# EAGLE board 8relais (EAGLE 4.16)
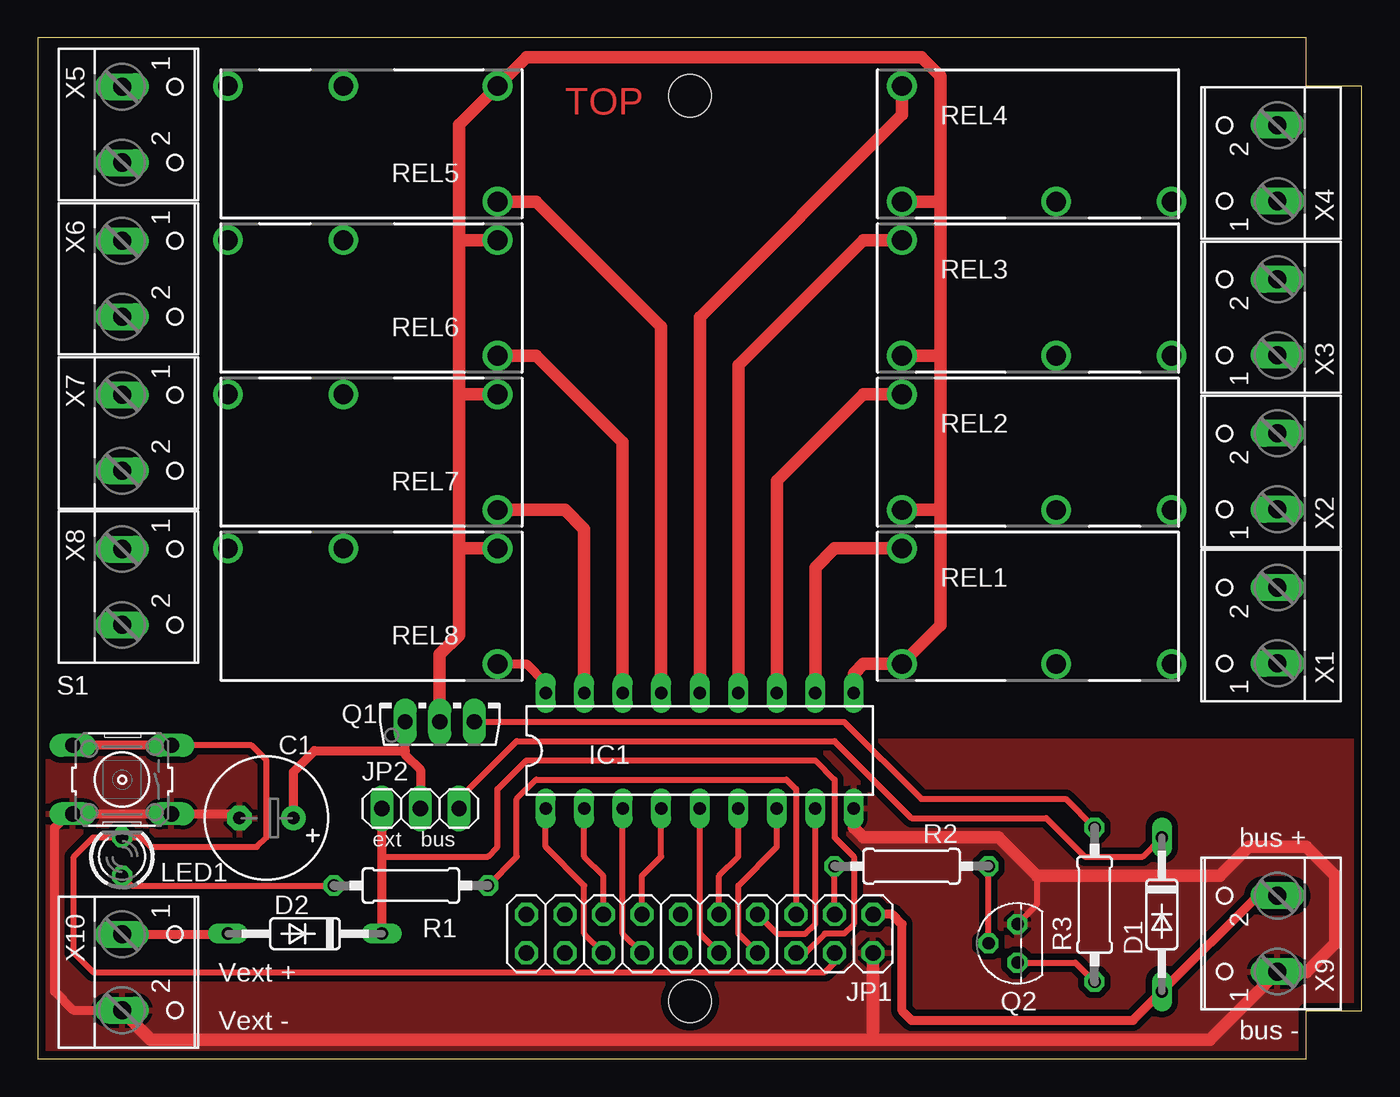
[diagram p0: board, top side]
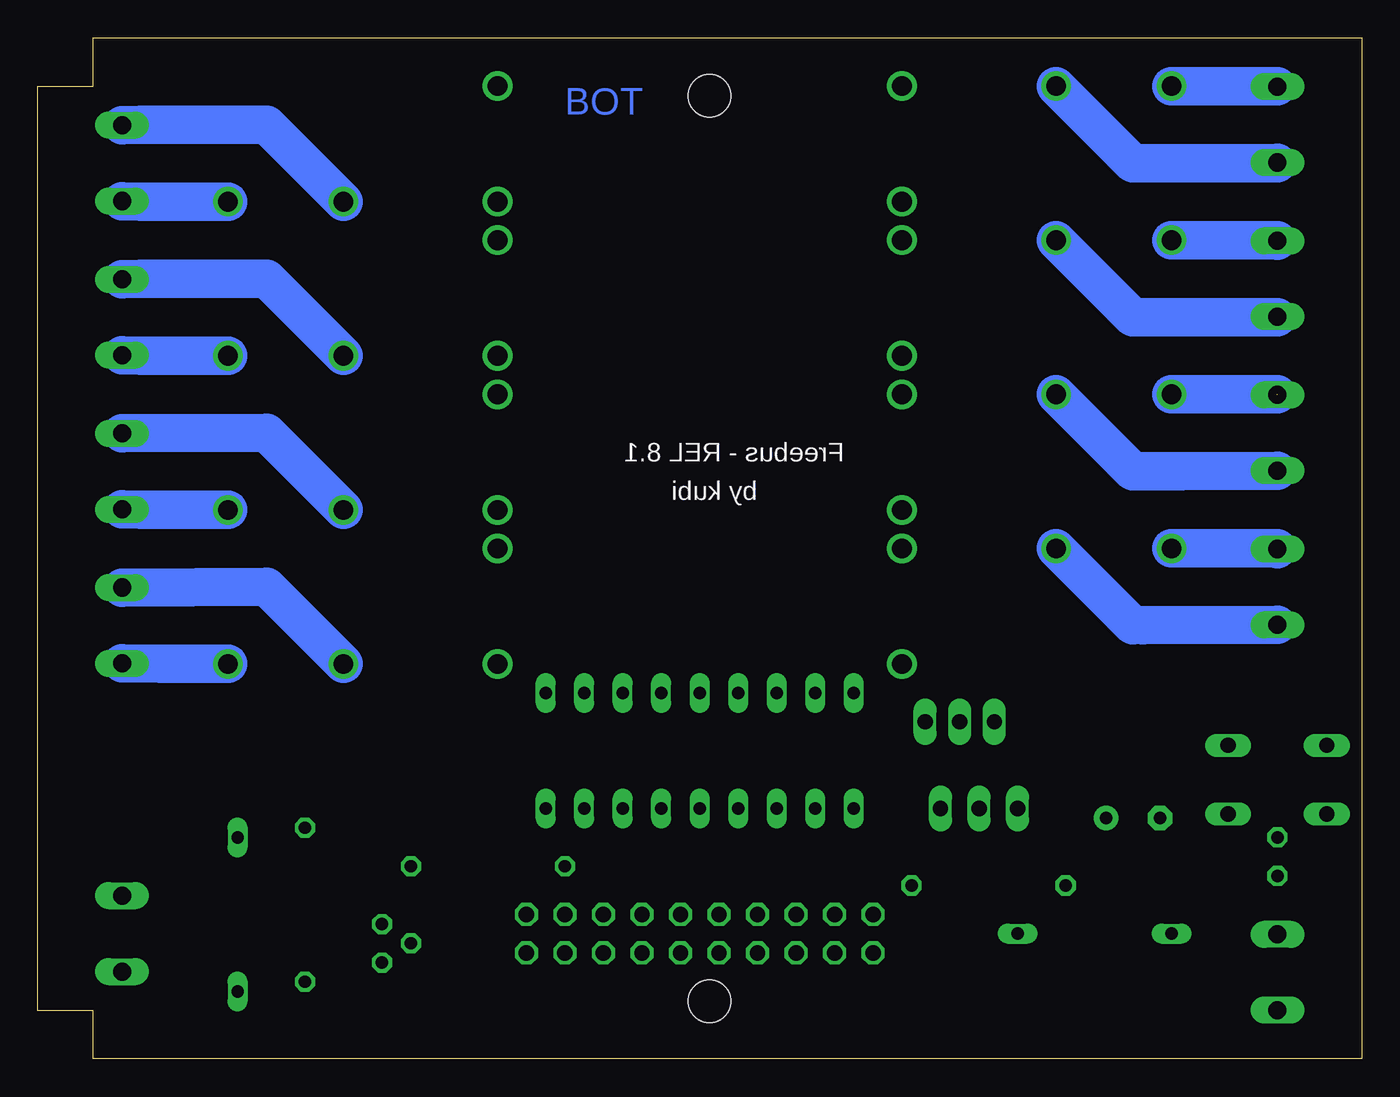
[diagram p1: board, bottom side, seen from below]

Size 87.3 x 67.31 mm. Coordinates in mm from the lower left corner, seen from the top.
Outline: 0,0.01 83.66,0 83.66,3.18 87.3,3.18 87.3,64.13 83.66,64.13 83.66,67.31 0,67.31 0,0.01
Copper layers (1*16): Top 0.035mm / dielectric 1.5mm / Bottom 0.035mm
Design rules "default": minimum track width 10mil, minimum drill 24mil, track to track 16mil, track to pad 12mil, pad to pad 16mil, via to via 16mil, smd to smd 8mil, copper to edge 20mil, drill to drill 10mil, minimum pad ring 10mil, minimum via ring 8mil, stop-mask expansion 4mil, vias tented up to drill 0mil, thermal gap 10mil
Holes 2.8 mm at 43.02,3.81 43.02,63.5

## Footprints (pad centres in the part's own frame; a part is rotated, then mirrored left to right if it is on the bottom)
E3,5-8 = drill 0.813 pad 1.6 round: + -1.778,0 | drill 0.813 pad 1.6 octagon: - 1.778,0
DO35-10 = drill 0.813 long: A 5.08,0; C -5.08,0
DIL18 = drill 0.813 long: 1 -10.16,-3.81; 2 -7.62,-3.81; 3 -5.08,-3.81; 4 -2.54,-3.81; 5 0,-3.81; 6 2.54,-3.81; 7 5.08,-3.81; 8 7.62,-3.81; 9 10.16,-3.81; 10 10.16,3.81; 11 7.62,3.81; 12 5.08,3.81; 13 2.54,3.81; 14 0,3.81; 15 -2.54,3.81; 16 -5.08,3.81; 17 -7.62,3.81; 18 -10.16,3.81
2X10 = drill 1.016 octagon: 1 -11.43,-1.27; 2 -11.43,1.27; 3 -8.89,-1.27; 4 -8.89,1.27; 5 -6.35,-1.27; 6 -6.35,1.27; 7 -3.81,-1.27; 8 -3.81,1.27; 9 -1.27,-1.27; 10 -1.27,1.27; 11 1.27,-1.27; 12 1.27,1.27; 13 3.81,-1.27; 14 3.81,1.27; 15 6.35,-1.27; 16 6.35,1.27; 17 8.89,-1.27; 18 8.89,1.27; 19 11.43,-1.27; 20 11.43,1.27
1X03 = drill 1.016 long: 1 -2.54,0; 2 0,0; 3 2.54,0
LED3MM = drill 0.813 octagon: A -1.27,0; K 1.27,0
TO126AV = drill 1.016 long: B 2.286,-1.27; C 0,-1.27; E -2.286,-1.27
TO92 = drill 0.813 octagon: 1 1.27,0; 2 0,1.905; 3 -1.27,0
0207/10 = drill 0.813 octagon: 1 -5.08,0; 2 5.08,0
RE-SCHRACK = drill 1.3 round: 11 8.89,-3.81; 14 1.27,-3.81; A1 -8.89,-3.81; A2 -8.89,3.81
B3F-10XX = drill 1.016 long: 1 -3.251,2.261; 2 3.251,2.261; 3 -3.251,-2.261; 4 3.251,-2.261
W237-102 = drill 1.194 long: 1 -2.5,-1.27; 2 2.5,-1.27

## Placement (x,y rotation side)
C1  10µ  [E3,5-8]  15.08,15.88 180 top
D1  1N4148  [DO35-10]  74.13,9.53 270 top
D2  1N4148  [DO35-10]  17.61,8.26 180 top
IC1  ULN2803  [DIL18]  43.65,20.32 0 top
JP1  [2X10]  43.65,8.26 180 top
JP2  [1X03]  25.23,16.51 0 top
LED1  rot  [LED3MM]  5.55,13.33 90 top
Q1  BD138  [TO126AV]  26.5,23.5 0 top
Q2  BC547  [TO92]  64.61,7.62 90 top
R1  1k  [0207/10]  24.6,11.43 180 top
R2  10k  [0207/10]  57.62,12.7 0 top
R3  10k  [0207/10]  69.69,10.16 90 top
REL1  G5Q-1A  [RE-SCHRACK]  65.88,29.85 0 top
REL2  G5Q-1A  [RE-SCHRACK]  65.88,40 0 top
REL3  G5Q-1A  [RE-SCHRACK]  65.88,50.16 0 top
REL4  G5Q-1A  [RE-SCHRACK]  65.88,60.32 0 top
REL5  G5Q-1A  [RE-SCHRACK]  21.42,60.32 180 top
REL6  G5Q-1A  [RE-SCHRACK]  21.42,50.16 180 top
REL7  G5Q-1A  [RE-SCHRACK]  21.42,40 180 top
REL8  G5Q-1A  [RE-SCHRACK]  21.42,29.85 180 top
S1  Programmiertaster  [B3F-10XX]  5.55,18.42 180 top
X1  [W237-102]  80.48,28.58 90 top
X2  [W237-102]  80.48,38.73 90 top
X3  [W237-102]  80.48,48.89 90 top
X4  [W237-102]  80.48,59.05 90 top
X5  [W237-102]  6.82,61.59 270 top
X6  [W237-102]  6.82,51.43 270 top
X7  [W237-102]  6.82,41.27 270 top
X8  [W237-102]  6.82,31.12 270 top
X9  [W237-102]  80.48,8.26 90 top
X10  [W237-102]  6.82,5.71 270 top

## Library data of the parts
C1 R1-R3 = rcl
D1 D2 = diode
IC1 = uln-udn
JP1 JP2 = pinhead
LED1 = led
Q1 = transistor-power
Q2 = transistor-npn
REL1-REL8 = relay
S1 = switch-omron
X1-X10 = con-wago-500

## Nets
GND: C1.- IC1.9 JP1.2 Q2.1 S1.1 S1.2 X9.1 X10.2
IO1: IC1.1 JP1.16
IO2: IC1.2 JP1.15
IO3: IC1.3 JP1.14
IO4: IC1.4 JP1.13
IO5: IC1.5 JP1.10
IO6: IC1.6 JP1.9
IO7: IC1.7 JP1.8
IO8: IC1.8 JP1.7
N$1: REL4.11 X4.1
N$2: REL4.14 X4.2
N$3: REL3.11 X3.1
N$4: REL3.14 X3.2
N$5: REL2.11 X2.1
N$6: REL2.14 X2.2
N$7: REL1.11 X1.1
N$8: REL1.14 X1.2
N$9: REL5.11 X5.1
N$10: REL6.11 X6.1
N$11: REL7.11 X7.1
N$12: REL8.11 X8.1
N$13: REL5.14 X5.2
N$14: REL6.14 X6.2
N$15: REL7.14 X7.2
N$16: REL8.14 X8.2
N$17: D2.A X10.1
N$19: IC1.10 Q1.C REL1.A1 REL2.A1 REL3.A1 REL4.A1 REL5.A1 REL6.A1 REL7.A1 REL8.A1
N$20: D1.A JP1.1 X9.2
N$24: JP1.5 R1.1
N$27: JP1.4 LED1.K S1.3 S1.4
N$28: LED1.A R1.2
N$31: D2.C JP1.6 JP2.1
N$32: D1.C JP2.3
N$33: JP1.3 R2.1
N$37: Q1.B R3.2
N$38: Q2.3 R3.1
N$39: Q2.2 R2.2
R1: IC1.14 REL4.A2
R2: IC1.13 REL3.A2
R3: IC1.12 REL2.A2
R4: IC1.11 REL1.A2
R5: IC1.15 REL5.A2
R6: IC1.16 REL6.A2
R7: IC1.17 REL7.A2
R8: IC1.18 REL8.A2
VDD: C1.+ JP2.2 Q1.E

## Tracks (layer width: path | path; a pad name or v marks a point on that pad's centre or on a via)
GND
  Top 0.406: 3.29,16.15 3.01,15.88 2.73,16.15 S1.2 | Q2.1 65.88,10.16 65.88,12.06
  Top 0.61: S1.2 2.02,16.15 1.1,15.24 1.1,4.45 2.33,3.21 X10.2 | 3.29,16.15 S1.1 12.89,16.15 13.17,15.88 C1.- | 81.75,5.71 X9.1
  Top 0.813: 55.08,1.27 7.46,1.27 5.55,3.17 X10.2 | 55.08,1.27 77.3,1.27 81.75,5.71 83.66,5.71 85.56,7.62 85.56,12.06 83.66,13.97 79.84,13.97 77.94,12.06 65.88,12.06 63.34,14.61 54.45,14.61 53.81,15.24 IC1.9 | 55.08,1.27 JP1.2
  pour Top: 0.47,0.64 0.47,20.96 86.83,20.96 86.83,0.64
IO1
  Top 0.406: IC1.1 33.49,13.97 36.03,11.43 36.03,8.26 JP1.16
IO2
  Top 0.406: JP1.15 37.3,12.06 36.03,13.33 IC1.2
IO3
  Top 0.406: IC1.3 38.57,8.26 JP1.14
IO4
  Top 0.406: JP1.13 39.84,12.06 41.11,13.33 IC1.4
IO5
  Top 0.406: IC1.5 43.65,8.26 JP1.10
IO6
  Top 0.406: JP1.9 44.92,12.06 46.19,13.33 IC1.6
IO7
  Top 0.406: IC1.7 48.73,13.97 46.19,11.43 46.19,8.26 JP1.8
IO8
  Top 0.406: JP1.7 48.73,8.26 50.63,8.26 51.27,8.89 IC1.8
N$1
  Bottom 2.54: X4.1 80.48,56.52 REL4.11
N$2
  Bottom 2.54: REL4.14 72.22,61.59 80.48,61.59 X4.2
N$3
  Bottom 2.54: X3.1 80.48,46.35 REL3.11
N$4
  Bottom 2.54: REL3.14 72.22,51.43 80.48,51.43 X3.2
N$5
  Bottom 2.54: X2.1 80.48,36.2 REL2.11
N$6
  Bottom 2.54: X2.2 72.22,41.27 REL2.14
N$7
  Bottom 2.54: X1.1 79.21,26.04 REL1.11
N$8
  Bottom 2.54: X1.2 72.22,31.12 REL1.14
N$9
  Bottom 1.778: X5.1 5.55,64.14
  Bottom 2.54: 5.55,64.14 REL5.11
N$10
  Bottom 2.54: X6.1 5.55,53.98 REL6.11
N$11  (1 unrouted)
  Bottom 2.54: 5.55,43.81 REL7.11
N$12
  Bottom 2.54: REL8.11 5.55,33.66 X8.1
N$13
  Bottom 2.54: REL5.14 15.08,59.05 5.55,59.05 X5.2
N$14
  Bottom 1.778: X6.2 5.55,48.89
  Bottom 2.54: REL6.14 15.08,48.89 5.55,48.89
N$15
  Bottom 2.54: REL7.14 15.08,38.73 11.9,38.73 X7.2
N$16
  Bottom 1.778: 14.44,28.58 15.08,28.58
  Bottom 2.54: 15.08,28.58 REL8.14 | X8.2 14.44,28.58
N$17
  Top 0.61: X10.1 12.5,8.21 D2.A
N$19
  Top 0.813: 27.77,33.66 REL8.A1 | 27.77,33.66 27.77,43.81 | 27.77,43.81 REL7.A1 | 27.77,43.81 27.77,53.98 | 27.77,53.98 REL6.A1 | 27.77,53.98 27.77,61.59 REL5.A1 32.22,66.04 58.25,66.04 59.52,64.77 59.52,56.52 | 59.52,56.52 59.52,46.35 | 59.52,46.35 59.52,36.2 | 59.52,36.2 59.52,28.58 REL1.A1 54.45,26.04 53.81,25.4 IC1.10 | 59.52,36.2 REL2.A1 | 59.52,46.35 REL3.A1 | 59.52,56.52 REL4.A1 | Q1.C 26.5,26.04 26.5,26.67 27.77,27.94 27.77,33.66
N$20
  Top 0.61: X9.2 80.44,10.75 D1.A 72.22,2.54 57.62,2.54 56.98,3.17 56.98,8.89 56.35,9.53 JP1.1
N$24
  Top 0.406: JP1.5 50,17.78 49.37,18.42 32.85,18.42 31.58,17.15 31.58,13.33 R1.1
N$27
  Top 0.406: JP1.4 52.54,6.35 51.91,5.71 3.64,5.71 2.38,6.98 2.38,13.33 3.64,14.61 LED1.K 6.82,14.61 7.46,13.97 14.44,13.97 15.08,14.61 15.08,19.69 14.08,20.68 S1.3
  Top 0.61: 8.09,20.68 S1.4 | S1.3 8.09,20.68 | 8.09,20.68 8.09,20.96
N$28
  Top 0.406: LED1.A 6.18,11.43 R1.2
N$31
  Top 0.406: JP1.6 50.63,6.98 51.91,8.26 53.17,8.26 53.81,8.89 53.81,13.33 52.54,14.61 52.54,18.42 51.27,19.69 32.22,19.69 30.31,17.78 30.31,13.97 29.68,13.33 22.7,13.33
  Top 0.61: JP2.1 22.7,13.33 D2.C
N$32
  Top 0.406: D1.C 72.86,13.33 69.05,13.33 66.51,15.88 57.62,15.88 52.54,20.96 31.58,20.96 27.77,17.15 JP2.3
N$33
  Top 0.406: JP1.3 R2.1
N$37
  Top 0.406: R3.2 67.78,17.15 58.25,17.15 53.17,22.23 Q1.B
N$38
  Top 0.406: Q2.3 68.41,6.35 R3.1
N$39
  Top 0.406: Q2.2 R2.2
R1
  Top 0.813: REL4.A2 56.98,62.23 43.65,48.89 IC1.14
R2
  Top 0.813: REL3.A2 54.45,53.98 46.19,45.72 IC1.13
R3
  Top 0.813: REL2.A2 54.45,43.81 48.73,38.1 IC1.12
R4
  Top 0.813: REL1.A2 52.54,33.66 51.27,32.38 IC1.11
R5
  Top 0.813: REL5.A2 32.85,56.52 41.11,48.26 IC1.15
R6
  Top 0.813: REL6.A2 32.85,46.35 38.57,40.64 IC1.16
R7
  Top 0.813: REL7.A2 34.76,36.2 36.03,34.92 IC1.17
R8
  Top 0.61: IC1.18 33.49,24.77 32.22,26.04 REL8.A2
VDD
  Top 0.61: C1.+ 16.85,18.92 18.25,20.32 24.22,20.32 | 24.22,20.32 24.22,20.07 25.23,19.05 JP2.2 | 24.22,20.32 Q1.E

## Text on the board
Top: TOP
Bottom: BOT
tPlace: ext | bus | bus + | Vext + | Vext - | bus -
bPlace: Freebus - REL 8.1 | by kubi